# Altium PCB MiniSub_Power_Board.PcbDoc
Units mil, origin at the board's own origin, x right, y up, seen from the top; angles counter-clockwise.
Board outline 5010 x 2925 mil, 4 copper layers (Top Layer, Ground, Battery Voltage, Bottom Layer), stack 62.2 mil thick; 96 components, 76 nets, 384 pads, 84 vias.
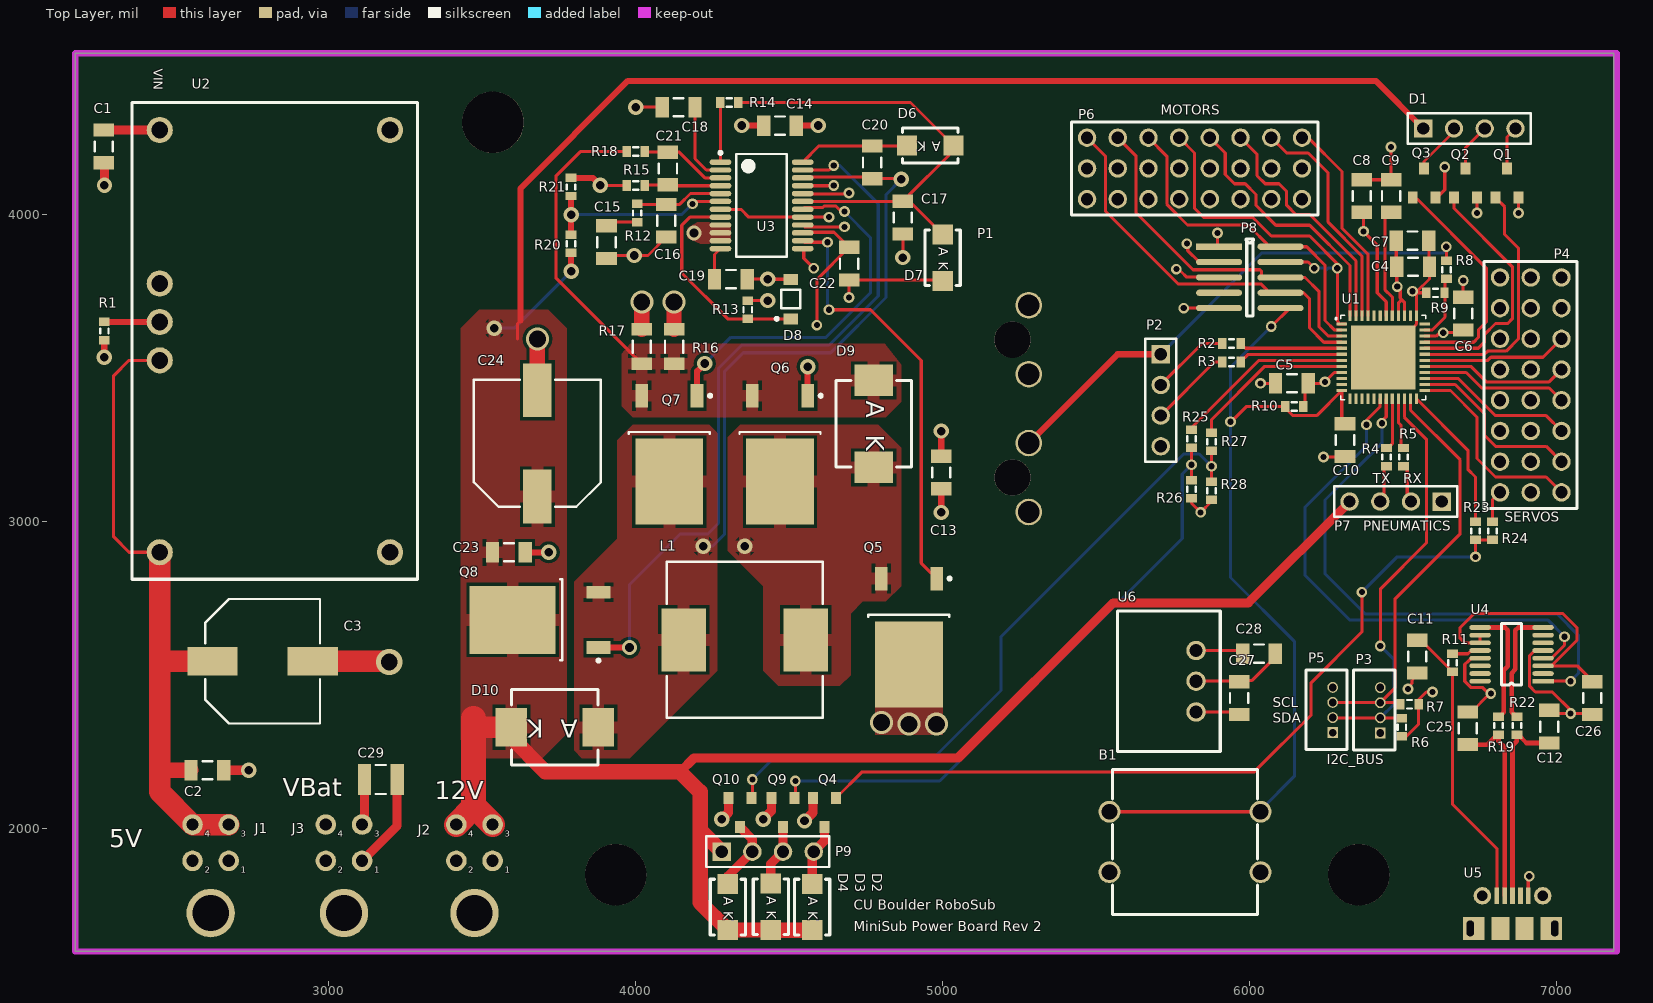
[diagram p0: Top Layer view]
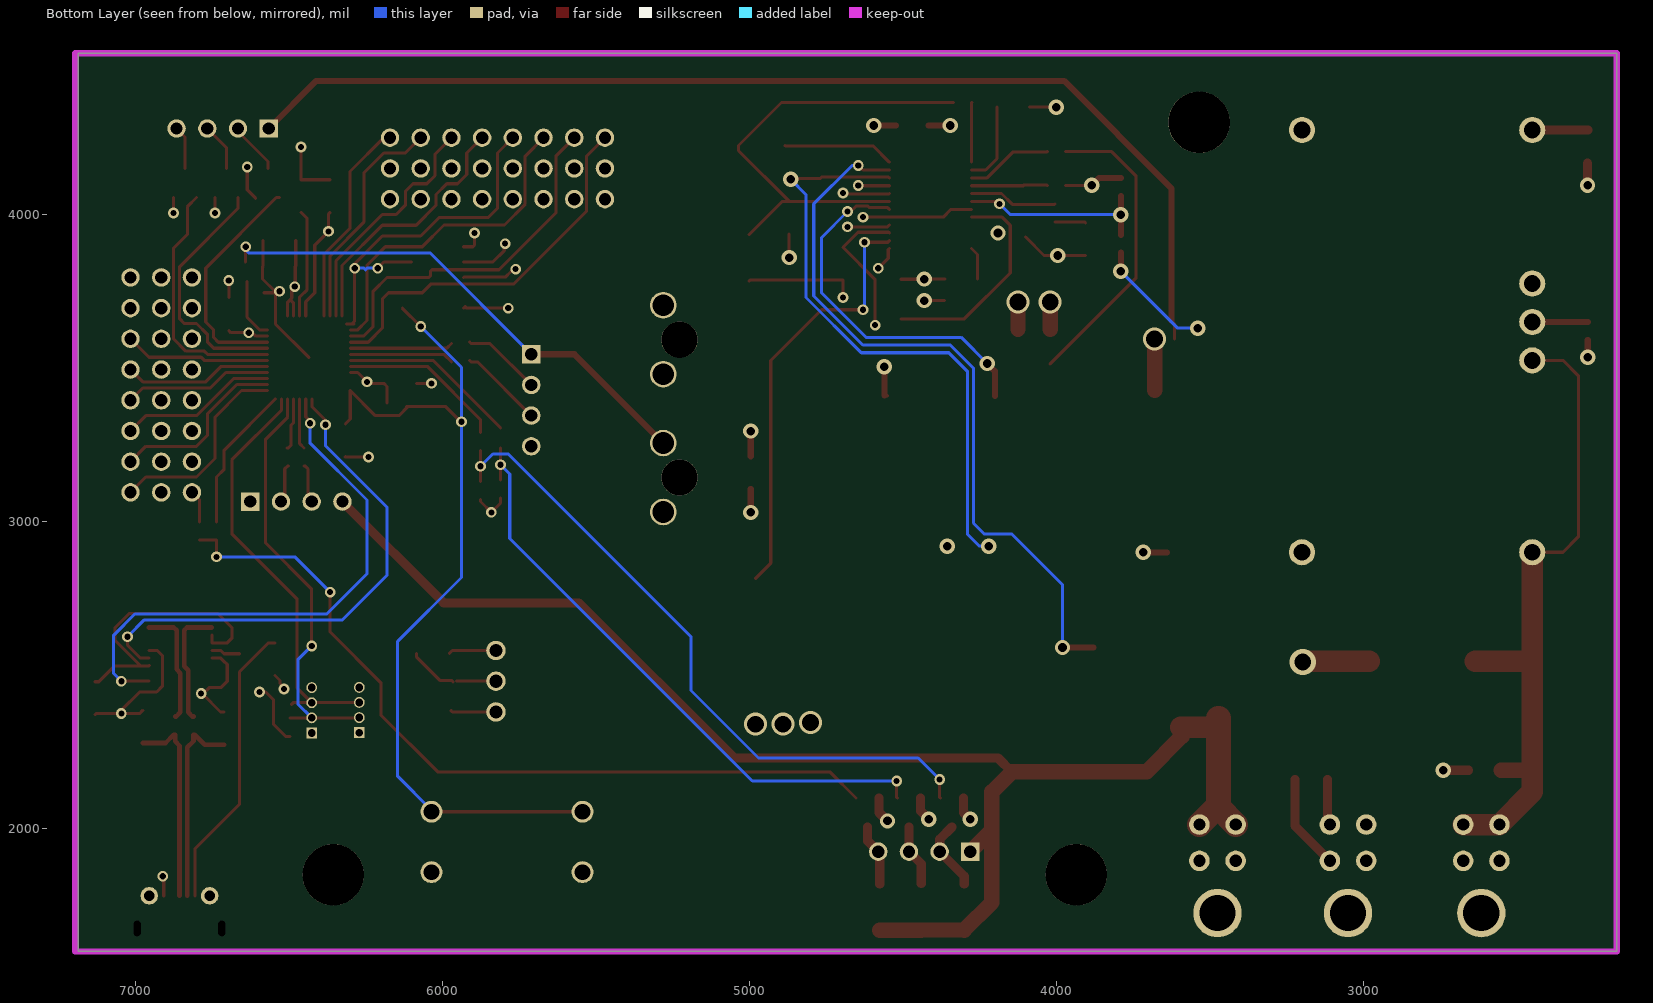
[diagram p1: Bottom Layer view, seen from below]
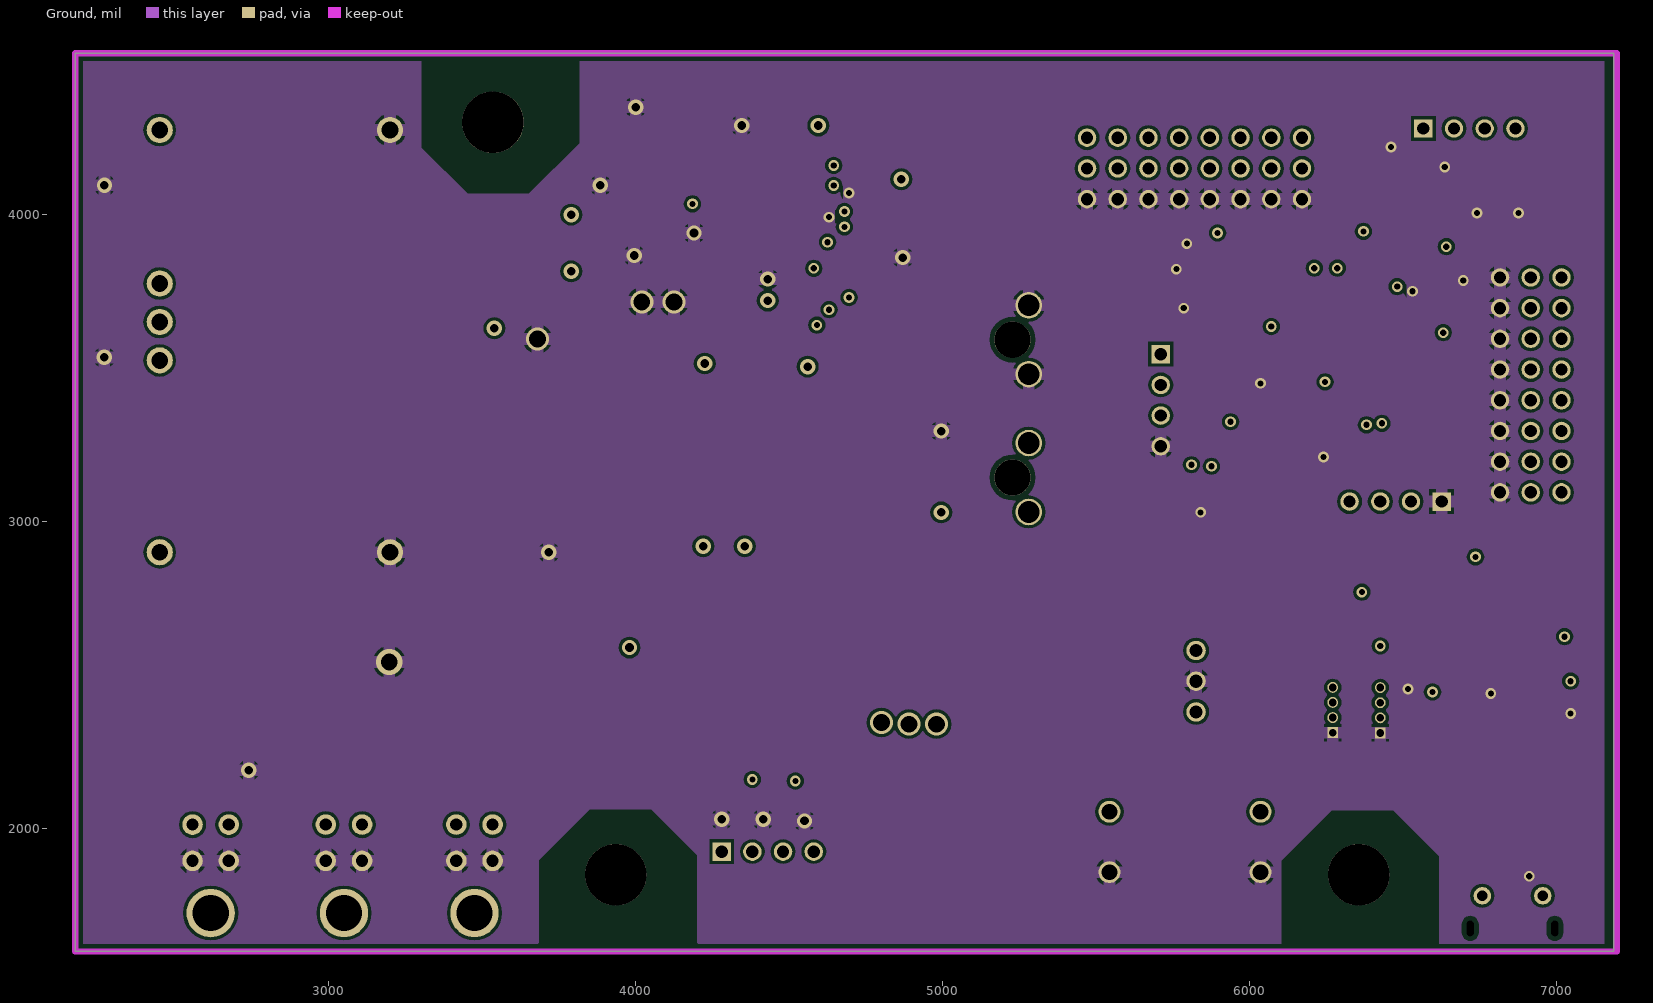
[diagram p2: Ground]
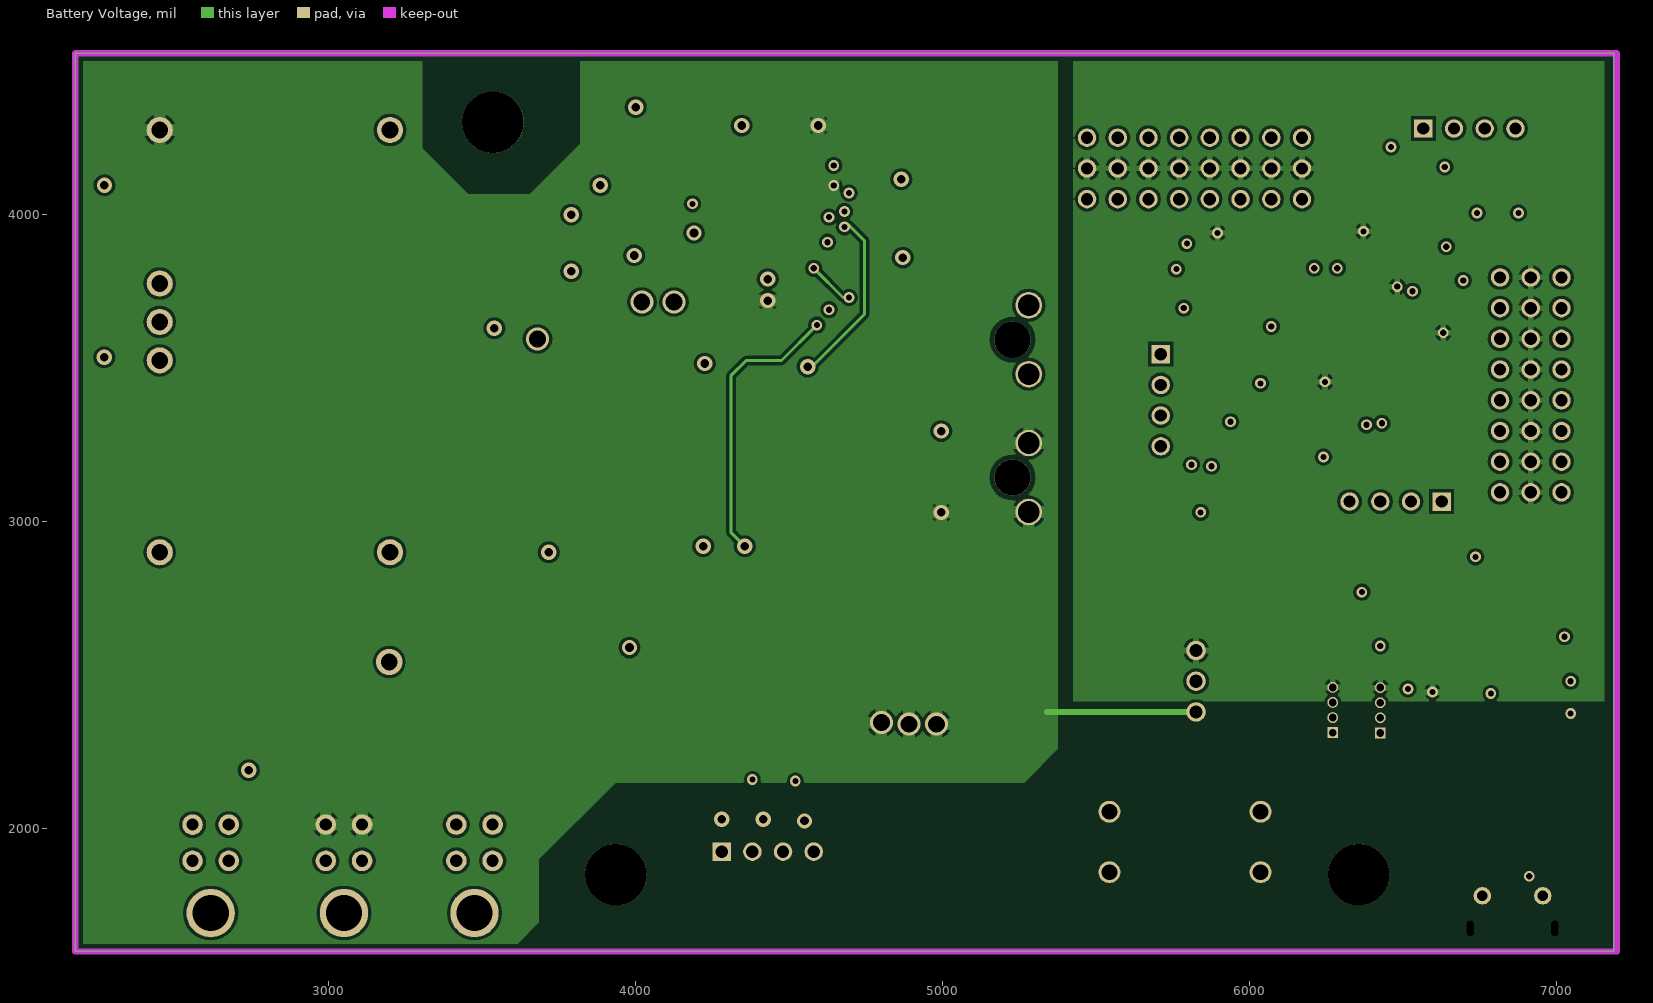
[diagram p3: Battery Voltage]

## Layer stack, top to bottom
Top Solder: solder mask 0.4, Solder Resist, Dk 3.5
Top Layer: signal copper 1.4
Dielectric 1: core 8, FR-4, Dk 4.6
Ground: signal copper 0.7
Dielectric 3: prepreg 42, FR-4, Dk 4.6
Battery Voltage: signal copper 0.7
Dielectric 2: core 8, FR-4, Dk 4.6
Bottom Layer: signal copper 1.4
Bottom Solder: solder mask 0.4, Solder Resist, Dk 3.5

## Board outline
2175,1600 2175,4525 7185,4525 7185,1600

## Design rules (kind name [scope] priority, off if disabled: settings)
BoardOutlineClearance [All] p1: gap=25 ignorepadtopadclearanceinfootprint=FALSE
Clearance Clearance_1 [IsNamedPolygon('TL_12V_GND')] p1: gap=10 ignorepadtopadclearanceinfootprint=FALSE except(3.5: Arc-Arc Arc-Track Arc-SMDPad Arc-Via Arc-Text Track-Track Track-SMDPad Track-Via Track-Text SMDPad-SMDPad SMDPad-Via SMDPad-Fill SMDPad-Poly SMDPad-Region SMDPad-Text Via-Via Via-Text Text-Text; 5: Arc-THPad Arc-Hole Track-THPad Track-Hole SMDPad-THPad SMDPad-Hole THPad-THPad THPad-Via THPad-Text THPad-Hole Via-Hole Text-Hole; 15: Fill-Hole Poly-Hole Region-Hole)
Clearance [All] p2: gap=10 ignorepadtopadclearanceinfootprint=FALSE except(3.5: Arc-Arc Arc-Track Arc-SMDPad Arc-Via Arc-Text Track-Track Track-SMDPad Track-Via Track-Text SMDPad-SMDPad SMDPad-Via SMDPad-Text Via-Via Via-Text Text-Text; 5: Arc-THPad Arc-Hole Track-THPad Track-Hole SMDPad-THPad SMDPad-Hole THPad-THPad THPad-Via THPad-Text THPad-Hole Via-Hole Text-Hole; 15: Fill-Hole Poly-Hole Region-Hole)
DiffPairsRouting [All] p1: maxlimit=10 minlimit=10 mostfreqgap=10 toplayer_minwidth=15 toplayer_maxwidth=15 toplayer_prefwidth=15 midlayer1_minwidth=15 midlayer1_maxwidth=15 midlayer1_prefwidth=15 midlayer2_minwidth=15 midlayer2_maxwidth=15 midlayer2_prefwidth=15 bottomlayer_minwidth=15 bottomlayer_maxwidth=15 bottomlayer_prefwidth=15 maxuncoupledlength=500
HoleSize [All] p1: absolutevalues=TRUE maxlimit=248.03 minlimit=7.87 maxpercent=80.000 minpercent=20.000
MinimumSolderMaskSliver [All] p1: minsoldermaskwidth=3.5
PolygonConnect PolygonConnect_3 [All vs IsNamedPolygon('TL_12V_VBat','TL_12V_GND')] p1: connectstyle=Direct reliefconductorwidth=40 reliefentries=4 polygonreliefangle="90 Angle" airgapwidth=10
PolygonConnect PolygonConnect_2 [All vs IsNamedPolygon('Top Layer-NetC23_2','Top Layer-NetC20_1','Top Layer-NetC22_1','Top Layer-NetD9_A','Ground','Battery Voltage-Vbat')] p2: connectstyle=Relief reliefconductorwidth=40 reliefentries=4 polygonreliefangle="90 Angle" airgapwidth=10
PolygonConnect PolygonConnect_1 [All vs IsNamedPolygon('Top Layer-NetC23_2') Or  IsNamedPolygon('Top Layer-NetC20_1') Or  IsNamedPolygon('Top Layer-NetC22_1') Or  IsNamedPolygon('Top Layer-NetD9_A') Or  IsNamedPolygon('Ground')] p3: thpad.connectstyle=Relief thpad.reliefconductorwidth=10 thpad.reliefentries=4 thpad.polygonreliefangle="90 Angle" thpad.airgapwidth=10 smdpad.connectstyle=Relief smdpad.reliefconductorwidth=10 smdpad.reliefentries=4 smdpad.polygonreliefangle="90 Angle" smdpad.airgapwidth=10 via.connectstyle=Relief via.reliefconductorwidth=40 via.reliefentries=4 via.polygonreliefangle="90 Angle" via.airgapwidth=10
PolygonConnect [All] p4: connectstyle=Relief reliefconductorwidth=20 reliefentries=4 polygonreliefangle="90 Angle" airgapwidth=10
RoutingVias [All] p1: holewidth=20 width=35 viastyle="Through Hole" minholewidth=7.87 minwidth=17.72 maxholewidth=60 maxwidth=100
SilkToSilkClearance [All] p1: silktosilkclearance=0
SilkToSolderMaskClearance [IsPad] p1: minsilkscreentomaskgap=3 clearancetoexposedcopper=TRUE
SolderMaskExpansion [All] p1: expansion=4 istentingtop=FALSE
Width [All] p1: maxlimit=100 minlimit=3.5 preferedwidth=10 minimp=50.000000 maximp=50.000000 favimp=50.000000
25 further rules are at their usual default settings.

## Classes and differential pairs
component class "Embedded Circuits": B1 C10 C11 C12 C25 C26 C27 C28 D1 D2 D3 D4 P8 P9 Q1 Q2 Q3 Q4 Q9 Q10 R10 R11 R19 R22 R23 R24 R25 R26 R27 R28 U4 U5 U6
component class Embedded_System_Top: P2 P3 P4 P5 P6 P7 R2 R3 R4 R5
component class Embedded_Chip: C4 C5 C6 C7 C8 C9 R6 R7 R8 R9 U1
component class MiniSub_Power_Board: C29 J1 J2 J3 P1
component class "5V Converter": C1 C2 C3 R1 U2
component class "12V Converter": C13 C14 C15 C16 C17 C18 C19 C20 C21 C22 C23 C24 D6 D7 D8 D9 D10 L1 Q5 Q6 Q7 Q8 R12 R13 R14 R15 R16 R17 R18 R20 R21 U3
differential pair USBD: +USBD_P -USBD_N
differential pair USBData: +USBData_P -USBData_N

## Components (designator, comment, footprint, x,y, rotation, side; value= is the part's Value field where it differs from the comment)
B1 "Push Button" "PUSH BUTTON" 5542.87,1858.15 r0 top
C1 "Cap Semi" C1206 2268.15,4221.85 r90 top value=3.3uF
C2 "Cap Semi" C1206 2605,2190 r180 top value=1uF
C3 "330uF" UUR1A331 2785,2545 r0 top
C4 "Cap Semi" C1206 6531.85,3830 r180 top value=10nF
C5 "Cap Semi" C1206 6136.85,3450 r0 top value=10nF
C6 "Cap Semi" C1206 6695,3676.85 r270 top value=100nF
C7 "Cap Semi" C1206 6530,3915 r180 top value=100nF
C8 "Cap Semi" C1206 6365,4060 r270 top value=10uF
C9 "Cap Semi" C1206 6460,4060 r90 top value=1uF
C10 "Cap Semi" C1206 6310,3265 r90 top value=1nF
C11 "Cap" C1206 6545,2560 r90 top value=10nF
C12 "Cap" C1206 6975,2331.85 r270 top value=47pF
C13 "Cap Semi" C1206 4995,3159.65 r270 top value=22u
C14 "Cap Semi" C1206 4470,4289.65 r0 top value=3.3u
C15 "Cap Semi" C1206 3905,3909.65 r90 top value=0.01u
C16 "Cap Semi" C1206 4100,3979.65 r90 top value=100p
C17 "Cap Semi" C1206 4870,3989.65 r90 top value=4.7u
C18 "Cap Semi" C1206 4140,4349.65 r0 top value=0.001u
C19 "Cap Semi" C1206 4310,3789.65 r180 top value=0.001u
C20 "Cap Semi" C1206 4770,4169.65 r90 top value=0.22u
C21 "Cap Semi" C1206 4105,4149.65 r90 top value=100p
C22 "Cap Semi" C1206 4695,3839.65 r270 top value=0.22u
C23 "Cap Semi" C1206 3586.85,2899.65 r180 top value=22u
C24 "390uF" PCVXXXXXMCLXGS 3680,3254.65 r90 top
C25 "Cap" C1206 6710,2326.85 r270 top value=47pF
C26 "Cap" C1206 7115,2425 r90 top value=100nF
C27 "Cap" C1206 5965,2425 r270 top value=10uF
C28 "Cap" C1206 6030,2570 r180 top value=10uF
C29 "HMK325C7475KN-TE" C1210 3170,2160 r0 top value=4.7uF
D1 "RGB LED Strip" "HEADER 1X4" 6565,4280 r0 top
D2 "1N58xx" 1N58XX 4575,1820 r270 top
D3 "1N58xx" 1N58XX 4440,1820.79 r270 top
D4 "1N58xx" 1N58XX 4300,1820 r270 top
D6 "1N5819HW" 1N58XX 5035,4224.65 r180 top
D7 "1N5819HW" 1N58XX 5000,3934.65 r270 top
D8 "MMSZ5230B" ONSC-SOD-123-2-425-04_V 4505,3724.65 r90 top
D9 "MBRS340" MBRS340 4775,3459.65 r270 top
D10 "MBRS340" MBRS340 3878.46,2329.65 r180 top
J1 "Molex 43045-0402" MOLEX43045-0402 2556.89,1895 r0 top
J2 "Molex 43045-0402" MOLEX43045-0402 3415.94,1895.08 r0 top
J3 "Molex 43045-0402" MOLEX43045-0402 2990.94,1895.08 r0 top
L1 "SRR1240-4R7M" SRR1240 4355,2614.65 r180 top
P1 "Molex2002411114" MOLEX2002411114 5280,3367.8 r270 top
P2 "Header 4" "HEADER 1X4" 5710,3545 r270 top
P3 "Depth Sensor Header" DF13-4P-1.25DSA 6425,2311.57 r90 top
P4 "Header 8X3" "HEADER 8X3" 7015,3795 r180 top
P5 "Header 4" DF13-4P-1.25DSA 6270,2312.36 r90 top
P6 "Header 8X3" "HEADER 8X3" 5470,4250 r270 top
P7 "Header 4" "HEADER 1X4" 6625,3065 r180 top
P8 "FTSH-105-01-L-DV-K-TR" FTSH-105-01-L-DV-K-TR 5900,3895 r0 top
P9 "Header 4" "Header 1x4" 4280,1925 r0 top
Q1 "DMN1019USN" SOT-23 6800,4055 r0 top
Q2 "DMN1019USN" SOT-23 6665,4055 r0 top
Q3 "DMN1019USN" SOT-23 6530.2,4055 r0 top
Q4 "DMN1019USN" SOT-23 4652.4,2099.49 r180 top
Q5 "BUK6212" NXP-SOT428_M 4890,2625.2 r270 top
Q6 "BUK6212" NXP-SOT428_M 4470.16,3220.67 r270 top
Q7 "BUK6212" NXP-SOT428_M 4109.84,3220.67 r270 top
Q8 "BUK6212" NXP-SOT428_M 3690,2679.65 r180 top
Q9 "DMN1019USN" SOT-23 4517.4,2099.49 r180 top
Q10 "DMN1019USN" SOT-23 4377.4,2099.49 r180 top
R1 "Res3" J1-0603 2269.53,3620.47 r90 top value=21K
R2 "Res3" J1-0603 5940.47,3580 r0 top value=20
R3 "Res3" J1-0603 5940.47,3520 r0 top value=20
R4 "Res3" J1-0603 6445,3210 r270 top value=20
R5 "Res3" J1-0603 6501.06,3210 r270 top value=20
R6 "Res3" J1-0603 6495,2330 r90 top value=4.7K
R7 "Res3" J1-0603 6520,2405 r180 top value=4.7K
R8 "Res3" J1-0603 6640,3820 r90 top value=10K
R9 "Res3" J1-0603 6604.53,3745 r0 top value=2K
R10 "Res3" J1-0603 6145,3375 r0 top value=47k
R11 "Res3" J1-0603 6660,2540 r90 top value=0
R12 "Res3" J1-0603 4005,4004.65 r90 top value=100k
R13 "Res3" J1-0603 4365,3689.65 r90 top value=51k
R14 "Res3" J1-0603 4305,4364.65 r180 top value=100k
R15 "Res3" J1-0603 4000,4094.65 r180 top value=100
R16 "Res3" R1206 4125,3569.65 r270 top value=0.018
R17 "Res3" R1206 4020,3569.65 r270 top value=0.018
R18 "Res3" J1-0603 4000,4204.65 r180 top value=100
R19 "Res3" J1-0603 6810,2335.47 r270 top value=27
R20 "Res3" J1-0603 3790,3904.65 r270 top value=113k
R21 "Res3" J1-0603 3790,4089.65 r270 top value=8.06k
R22 "Res3" J1-0603 6870,2335.47 r90 top value=27
R23 "Res3" J1-0603 6735,2969.53 r270 top value=1k
R24 "Res3" J1-0603 6790,2969.53 r270 top value=10k
R25 "Res3" J1-0603 5810,3269.53 r270 top value=1k
R26 "Res3" J1-0603 5810,3105.47 r90 top value=10k
R27 "Res3" J1-0603 5875,3260 r270 top value=1k
R28 "Res3" J1-0603 5875,3100.47 r90 top value=10k
U1 "EFM32PG12B500F1024IM48-C" QFN50P700X700X90-49N 6434.53,3534.76 r0 top
U2 "PTN78020WAH" PTN78020WAH 3200,4275 r270 top
U3 "LTC3780EG#PBF" LT-G-24_L 4410,4029.65 r0 top
U4 "FT230x" FT230X 6955,2480 r180 top
U5 "Micro USB" "MICRO USB" 6729.65,1675 r0 top
U6 "R-78E3.3-1.0" R-78EXX-1.0 5825,2380 r90 top

## Footprints (in the part's own frame and the unit in brackets; to place one, negate y for a bottom-side part, rotate by r counter-clockwise, add the part's x,y. Pads: shape width x height; smd on the part's side, far side on the other; paste and mask are expansions set on the pad)
1N58XX [mm] "1A Schottky Barrier Rectifier Diode"
  rect 1.655x1.67 smd: A(0,0) K(3.83,0)
  silkscreen extent -0.39,-1.45 4.22,1.45, body extent -0.4,-2 4.2,1.45, height 2.4
C1206 [mm] "Chip Capacitor, Body 3.2x1.6mm, IPC High Density"
  rect 1.1x1.7 smd: 1(-1.35,0) 2(1.35,0)
  silkscreen extent -0.4,-0.75 0.4,0.75, body extent -1.7,-0.9 1.7,0.9, height 1.3
C1210 [mm] "Chip Capacitor, Body 3.2x2.5mm, IPC High Density"
  rect 1.1x2.6 smd: 1(-1.35,0) 2(1.35,0)
  silkscreen extent -0.4,-1.2 0.4,1.2, body extent -1.7,-1.35 1.7,1.35, height 1.3
DF13-4P-1.25DSA [mm] "Depth Sensor Header footprint"
  rect 0.9x0.9 hole 0.65: 1(0,0)
  round 0.9 hole 0.65: 2(1.25,0) 3(2.5,0) 4(3.75,0)
  silkscreen extent -1.4,-1.2 5.2,2.2, body extent -1.43,-1.2 5.23,2.2, height 4.27
FT230X [mil] "USB to BASIC UART IC"
  rect 70x15 smd: 1(0,0)
  oval 70x15 smd: 2(0,-25) 3(0,-50) 4(0,-75) 5(0,-100) 6(0,-125) 7(0,-150) 8(0,-175) 9(205,-175) 10(205,-150) 11(205,-125) 12(205,-100) 13(205,-75) 14(205,-50) 15(205,-25) 16(205,0)
  silkscreen extent 70,-188 135,13, body extent 7,-205 200,31, height 54
FTSH-105-01-L-DV-K-TR [mil] "CONN HEADER 10POS DUAL .05\" SMD"
  rect 150x20 smd: 1(0,0)
  oval 150x20 smd: 2(200,0) 3(0,-50) 4(200,-50) 5(0,-100) 6(200,-100) 7(0,-150) 8(200,-150) 9(0,-200) 10(200,-200)
  silkscreen extent 88,-225 112,25, body extent -13,-224 217,26, height 241
"HEADER 1X4" [mil]
  rect 60x60 hole 40: 1(0,0)
  round 60 hole 40: 2(100,0) 3(200,0) 4(300,0)
  silkscreen extent -50,-50 350,50, body extent -50,-50 350,50, height 338
"Header 1x4" [mil]
  rect 60x60 hole 40: 1(0,0)
  round 60 hole 40: 2(100,0) 3(200,0) 4(300,0)
  silkscreen extent -50,-50 350,50, body extent -50,-50 350,50, height 338
"HEADER 8X3" [mil] "Connector Header Through Hole 24 position 0.1\""
  round 60 hole 40: 1(0,700) 2(100,700) 3(200,700) 4(0,600) 5(100,600) 6(200,600) 7(0,500) 8(100,500) 9(200,500) 10(0,400) 11(100,400) 12(200,400) 13(0,300) 14(100,300) 15(200,300) 16(0,200) 17(100,200) 18(200,200) 19(0,100) 20(100,100) 21(200,100) 22(0,0) 23(100,0) 24(200,0)
  silkscreen extent -51,-51 252,752, body extent -50,-50 250,750, height 330
J1-0603 [mm] "Chip Resistor, Body 1.6x0.8mm, IPC High Density"
  rect 0.7x0.9 smd: 1(-0.75,0) 2(0.75,0)
  silkscreen extent -0.2,-0.35 0.2,0.35, body extent -0.85,-0.48 0.85,0.48, height 0.9
LT-G-24_L [mm] "SOP, 24-Leads, Body 8.5x5.6mm, Pitch 0.65mm, IPC High Density"
  oval 1.8x0.45 smd mask+0.055: 1(-3.4,3.575) 2(-3.4,2.925) 3(-3.4,2.275) 4(-3.4,1.625) 5(-3.4,0.975) 6(-3.4,0.325) 7(-3.4,-0.325) 8(-3.4,-0.975) 9(-3.4,-1.625) 10(-3.4,-2.275) 11(-3.4,-2.925) 12(-3.4,-3.575) 13(3.4,-3.575) 14(3.4,-2.925) 15(3.4,-2.275) 16(3.4,-1.625) 17(3.4,-0.975) 18(3.4,-0.325) 19(3.4,0.325) 20(3.4,0.975) 21(3.4,1.625) 22(3.4,2.275) 23(3.4,2.925) 24(3.4,3.575)
  silkscreen extent -3.52,-4.25 2.1,4.47, body extent -2.8,-4.25 2.8,4.25, height 2
MBRS340 [mm] "Schottky Rectifier"
  rect 2.6x3.2 smd: A(0,0) K(7.2,0)
  silkscreen extent 0.02,-3.13 7.17,3.13, body extent -0.47,-3.55 7.68,3.6, height 2.65
"MICRO USB" [mm] "USB - micro B USB 2.0 Receptacle Connector 5 Position Surface Mount, Right Angle"
  round 0 hole 0.6 slot 1.3 at 90 deg unplated: 0(-0.3,0) 0(6.7,0)
  rect 1.8x1.9 smd: 0(0,0) 0(6.4,0)
  round 1.45 hole 0.85: 0(0.7,2.7) 0(5.7,2.7)
  rect 1.5x1.9 smd: 0(2.2,0) 0(4.2,0)
  rect 0.4x1.35 smd: 1(1.9,2.7) 2(2.55,2.7) 3(3.2,2.7) 4(3.85,2.7) 5(4.5,2.7)
  body extent -0.92,-2.6 7.28,2.8, height 2.73
MOLEX43045-0402 [mm] "43045-0402"
  round 1.7 hole 1.02: 1(3,0) 2(0,0) 3(3,3) 4(0,3)
  round 4 hole 3 unplated: ""(1.5,-4.32)
  body extent -3.57,-8.95 6.58,3.29, height 8.83
MOLEX2002411114 [mm]
  round 2.2 hole 1.8: 1(-8.55,0) 2(-2.85,0) 3(2.85,0) 4(8.55,0)
  round 3 hole 3 unplated: ""(-5.7,-1.34) ""(5.7,-1.34)
  body extent -11.72,-3.39 11.73,7.21, height 17.5
NXP-SOT428_M [mm] "DPAK, 3-Leads, Body 6.75x6.22mm, Pitch 2.29mm, IPC Low Density"
  rect 7.1x5.6 smd: D(2.3,0)
  rect 1.95x1.05 smd: G(-4.8,2.29) S(-4.8,-2.29)
  silkscreen extent -4.92,-3.35 -1.65,3.49, body extent -1.8,-3.37 4.42,3.37, height 2.38
ONSC-SOD-123-2-425-04_V [mm] "SOD, 2-Leads, Body 2.69x1.6mm"
  rect 0.91x1.22 smd: 1(-1.635,0) 2(1.635,0)
  silkscreen extent -1.76,-0.8 0.78,1.28, body extent -1.35,-0.8 1.35,0.8, height 1.35
PCVXXXXXMCLXGS [mm] "Aluminum Electrolytic Capacitor, Body 10.30x10.30x12.70mm, IPC Low Density"
  rect 4.45x2.35 smd: 1(-4.4,0) 2(4.4,0)
  silkscreen extent -5.25,-5.25 5.25,5.25, body extent -5.25,-5.25 5.25,5.25, height 12.7
PTN78020WAH [mil] "https://www.digikey.com/product-detail/en/texas-instruments/PTN78020WAH/296-20515-ND/717485"
  round 85 hole 55: 1(0,0) 2(0,-750) 3(500,-750) 4(625,-750) 5(750,-750) 6(1375,-750) 7(1375,0)
  Top Layer region: -35,-715
  Top Layer region: -35,35
  silkscreen extent -90,-840 1463,90, body extent -63,-832 1432,78, height 354
"PUSH BUTTON" [mm] "Tactile Switch SPST-NO Top Actuated Through Hole"
  round 1.808 hole 1.3: 1(12.5,0) 2(0,0) 3(12.5,5) 4(0,5)
  silkscreen extent 0.25,-3.5 12.25,8.5, body extent -0.77,-3.5 13.32,8.5, height 7.6
QFN50P700X700X90-49N [mm]
  rect 5.3x5.3 smd: 0(0,0)
  rect 0.86x0.26 smd: 1(-3.435,2.75) 2(-3.435,2.25) 3(-3.435,1.75) 4(-3.435,1.25) 5(-3.435,0.75) 6(-3.435,0.25) 7(-3.435,-0.25) 8(-3.435,-0.75) 9(-3.435,-1.25) 10(-3.435,-1.75) 11(-3.435,-2.25) 12(-3.435,-2.75) 25(3.435,-2.75) 26(3.435,-2.25) 27(3.435,-1.75) 28(3.435,-1.25) 29(3.435,-0.75) 30(3.435,-0.25) 31(3.435,0.25) 32(3.435,0.75) 33(3.435,1.25) 34(3.435,1.75) 35(3.435,2.25) 36(3.435,2.75)
  rect 0.26x0.86 smd: 13(-2.75,-3.435) 14(-2.25,-3.435) 15(-1.75,-3.435) 16(-1.25,-3.435) 17(-0.75,-3.435) 18(-0.25,-3.435) 19(0.25,-3.435) 20(0.75,-3.435) 21(1.25,-3.435) 22(1.75,-3.435) 23(2.25,-3.435) 24(2.75,-3.435) 37(2.75,3.435) 38(2.25,3.435) 39(1.75,3.435) 40(1.25,3.435) 41(0.75,3.435) 42(0.25,3.435) 43(-0.25,3.435) 44(-0.75,3.435) 45(-1.25,3.435) 46(-1.75,3.435) 47(-2.25,3.435) 48(-2.75,3.435)
  silkscreen extent -4,-3.5 3.5,3.5, body extent -3.5,-3.5 3.5,3.5, height 4.26
R1206 [mm] "Chip Resistor, 2-Leads, Body 3.10x1.60mm, IPC Medium Density"
  rect 1.05x1.7 smd: 1(-1.425,0) 2(1.425,0)
  silkscreen extent -0.5,-0.75 0.5,0.75, body extent -1.6,-0.85 1.6,0.85, height 0.65
R-78EXX-1.0 [mm] "1A DC/DC Voltage Converter"
  round 1.608 hole 1.1: 1(0,0) 2(2.54,0) 3(5.08,0)
  silkscreen extent -3.26,-2 8.34,6.5, body extent -3.3,-1.92 8.3,6.58, height 10.45
SOT-23 [mm]
  rect 0.8x1 smd: D(0.95,2.4) G(0,0) S(1.9,0)
  body extent -0.58,0.5 2.47,1.9, height 1.15
SRR1240 [mm] "Molded Inductor, 2-Leads, Body 12.50x12.50mm, IPC Medium Density"
  rect 3.7x5.2 smd: 1(-5.05,0) 2(5.05,0)
  silkscreen extent -6.45,-6.45 6.45,6.45, body extent -6.4,-6.4 6.4,6.4, height 4.5
UUR1A331 [mm] "Aluminum Electrolytic Capacitor, Body 9.50x10.30x10.30mm, IPC Low Density"
  rect 4.15x2.35 smd: 1(-4.15,0) 2(4.15,0)
  silkscreen extent -4.75,-5.15 4.75,5.15, body extent -4.75,-5.15 4.75,5.15, height 10.3

## Part data
B1: "Tactile Switch SPST-NO Top Actuated Through Hole", Digikey Link=https://www.digikey.com/product-detail/en/te-connectivity-alcoswitch-switches/FSM101/450-1157-ND/701084, Drawing=https://www.te.com/commerce/DocumentDelivery/DDEController?Action=srchrtrv&DocNm=1571140&DocType=Customer+Drawing&DocLang=English
C1 C2 C4 C5 C6 C7 C8 C9 C13 C14 C15 C16 C17 C18 C19 C20 C21 C22 C23: "Capacitor (Semiconductor SIM Model)", LatestRevisionDate=29-May-2009, LatestRevisionNote="IPC-7351 Footprint Added.", PackageDescription="Chip Capacitor", PackageReference=C1206, Published=8-Jun-2000, Publisher="Altium Limited"
C3 C24: library part PCV1E391MCL2GS, "CAP ALUM POLY 390UF 20% 25V SMD", Datasheet=http://nichicon-us.com/english/products/pdfs/e-pcv.pdf, Digikey=https://www.digikey.com/product-detail/en/nichicon/PCV1E391MCL2GS/493-4544-1-ND/2786841
C10: "Capacitor (Semiconductor SIM Model)", Supplier Part Number 1=490-4761-1-ND, LatestRevisionDate=29-May-2009, LatestRevisionNote="IPC-7351 Footprint Added.", PackageDescription="Chip Capacitor", PackageReference=C1206, Published=8-Jun-2000, Publisher="Altium Limited", Supplier 1=Digi-Key
C11: "Capacitor", Supplier Part Number 1=1276-1921-1-ND, LatestRevisionDate=17-Jul-2002, LatestRevisionNote="Re-released for DXP Platform.", PackageDescription="Radial Cap, Thru-Hole; 2 Leads; 0.3 in Pin Spacing", PackageReference=RAD-0.3, Published=8-Jun-2000, Publisher="Altium Limited", Supplier 1=Digi-Key
C12 C25: "Capacitor", Supplier Part Number 1=490-16375-1-ND, LatestRevisionDate=17-Jul-2002, LatestRevisionNote="Re-released for DXP Platform.", PackageDescription="Radial Cap, Thru-Hole; 2 Leads; 0.3 in Pin Spacing", PackageReference=RAD-0.3, Published=8-Jun-2000, Publisher="Altium Limited", Supplier 1=Digi-Key
C26: "Capacitor", Supplier Part Number 1=1276-1001-1-ND, LatestRevisionDate=17-Jul-2002, LatestRevisionNote="Re-released for DXP Platform.", PackageDescription="Radial Cap, Thru-Hole; 2 Leads; 0.3 in Pin Spacing", PackageReference=RAD-0.3, Published=8-Jun-2000, Publisher="Altium Limited", Supplier 1=Digi-Key
C27 C28: "Capacitor", Supplier Part Number 1=1276-2872-1-ND, LatestRevisionDate=17-Jul-2002, LatestRevisionNote="Re-released for DXP Platform.", PackageDescription="Radial Cap, Thru-Hole; 2 Leads; 0.3 in Pin Spacing", PackageReference=RAD-0.3, Published=8-Jun-2000, Publisher="Altium Limited", Supplier 1=Digi-Key
C29: library part "Cap Semi", "Capacitor (Semiconductor SIM Model)", ComponentLink1Description=Datasheet, ComponentLink1URL=https://www.yuden.co.jp/productdata/catalog/mlcc06_e.pdf, ComponentLink2Description=Digi-Key, ComponentLink2URL=https://www.digikey.com/product-detail/en/taiyo-yuden/HMK325C7475KN-TE/587-5038-1-ND/6563881, LatestRevisionDate=29-May-2009, LatestRevisionNote="IPC-7351 Footprint Added.", PackageDescription="Chip Capacitor", PackageReference=C1206, Published=8-Jun-2000, Publisher="Altium Limited"
D1: "LED RGB Strip - Bare Nonaddressable", Sparkfun Link=https://www.sparkfun.com/products/12021
D2 D3 D4: "1A Schottky Barrier Rectifier Diode", Datasheet=http://www.kesenes.com/pdf/1n5817-1n5819.pdf, Digikey=https://www.digikey.com/product-detail/en/comchip-technology/SS24-HF/641-SS24-HFCT-ND/10443817
D6 D7: library part 1N58xx, "1A Schottky Barrier Rectifier Diode", Datasheet=http://www.kesenes.com/pdf/1n5817-1n5819.pdf
D8: library part MMSZ5230BT1G, "Zener Voltage Regulator, 500 mW, 2-Pin SOD-123, Pb-Free, Tape and Reel", Manufacturer="On Semiconductor", Supplier Part Number 1=MMSZ5230BT1GOSTR-ND, ComponentLink1Description="Manufacturer URL", ComponentLink1URL=http://www.onsemi.com/, ComponentLink2Description=Datasheet, ComponentLink2URL=http://www.onsemi.com/pub_link/Collateral/MMSZ5221BT1-D.PDF, ComponentLink3Description="Package Specification", ComponentLink3URL=http://www.onsemi.com/pub_link/Collateral/425-04.PDF, DatasheetVersion="Rev. 12", Mounting Technology="Surface Mount", PackageDescription="2-Pin SOD, Body 1.6 x 2.69 mm", PackageReference=SOD-123-2-425-04, PackageVersion="Rev. G, 10/2009", Packing="Tape and Reel", PartNumber=MMSZ5230BT1G, P Max (W)=0.5, RoHS=Pb-Free, Supplier 1=Digi-Key, Supplier 2=Digi-Key, Supplier 3=Digi-Key, Supplier 4=Farnell, Supplier 5=Farnell, Supplier 6=Farnell, Supplier 7=Newark, Supplier 8=Newark, Supplier 9=Mouser, Supplier Part Number 2=MMSZ5230BT1GOSCT-ND, Supplier Part Number 3=MMSZ5230BT1GOSDKR-ND, Supplier Part Number 4=1431272, Supplier Part Number 5=1431272RL, Supplier Part Number 6=2370826, Supplier Part Number 7=83H7423, Supplier Part Number 8=67R1368, Supplier Part Number 9=863-MMSZ5230BT1G, VZ Typ (V)=4.7
D9 D10: "Schottky Rectifier", Datasheet=https://www.mouser.com/ds/2/308/MBRS340-1120985.pdf
J1 J2 J3: library part Molex43045-0402, "Micro-Fit 3.0 Right Angle Header, 3.00mm Pitch, Dual Row, 4 Circuits, with Snap-in Plastic Peg PCB Lock, Gold, Glow Wire Capable, Black", ComponentLink1Description="Molex Website", ComponentLink1URL=https://www.molex.com/molex/products/datasheet.jsp?part=active/0430450402_PCB_HEADERS.xml
L1: library part SRR1240, "FIXED IND 4.7UH 6A 18 MOHM SMD", Datasheet=https://www.bourns.com/docs/Product-Datasheets/SRR1240.pdf, Digikey=https://www.digikey.com/product-detail/en/bourns-inc/SRR1240-4R7M/SRR1240-4R7MCT-ND/2127398
P2 P5 P7 P9: "Header, 4-Pin", LatestRevisionDate=17-Jul-2002, LatestRevisionNote="Re-released for DXP Platform.", Publisher="Altium Limited"
P3: library part "Header 4", "Header, 4-Pin", LatestRevisionDate=17-Jul-2002, LatestRevisionNote="Re-released for DXP Platform.", Publisher="Altium Limited"
P4 P6: library part "Header 8X3 (2mm)", "Connector Header Through Hole 24 position 0.079\" (2.00mm)", Digikey=https://www.digikey.com/product-detail/en/samtec-inc/TMMH-108-01-T-T/SAM12190-ND/6692344, Drawing=http://suddendocs.samtec.com/prints/tmmh-1xx-xx-xx-x-xxx-mkt.pdf
P8: library part "JTAG Header", "CONN HEADER 10POS DUAL .05\" SMD", Datasheet=http://suddendocs.samtec.com/catalog_english/ftsh_smt.pdf, Digikey Link=https://www.digikey.com/product-detail/en/samtec-inc/FTSH-105-01-L-DV-K-TR/SAM13165CT-ND/8827920, Drawings=http://suddendocs.samtec.com/prints/ftsh-1xx-xx-xxx-dv-xxx-xxx-mkt.pdf
Q1 Q2 Q3 Q4 Q9 Q10: "12V N-Channel Enhancement Mode MOSFET", Datasheet=https://www.diodes.com/assets/Datasheets/DMN1019USN.pdf, Digikey=https://www.digikey.com/product-detail/en/diodes-incorporated/DMN1019USN-13/DMN1019USN-13DICT-ND/4898885
Q5 Q6 Q7 Q8: "N-Channel TrenchMOS Intermediate Level FET, 40 V, 50 A, 3-Pin SOT428, Tape and Reel", Manufacturer="NXP Semiconductors", PartNumber=BUK6212-40C,118, Supplier Part Number 1=568-6983-2-ND, Automotive Qualified=Y, Channel Type=N, Code_JEDEC=TO-252, Code_JEITA=SC-63, ComponentLink1Description="Manufacturer URL", ComponentLink1URL=http://www.nxp.com/, ComponentLink2Description=Datasheet, ComponentLink2URL=http://www.nxp.com/documents/data_sheet/BUK6212-40C.pdf, ComponentLink3Description="Package Specification", ComponentLink3URL=http://www.nxp.com/documents/outline_drawing/sot428_po.pdf, DatasheetVersion="Rev. 2", ID [max] (A)=50, IDM [max] (A)=233, Mounting Technology="Surface Mount", PackageDescription="3-Pin Plastic Single-ended Surface Mounted Package, Body 6.1 x 6.6 mm, Pitch 2.285 mm", PackageReference=SOT428, PackageVersion="14-06-10, 06/2014", Packing="Tape & Reel", Qr [typ] (nC)=38, Supplier 1=Digi-Key, Supplier 2=Digi-Key, Supplier 3=Digi-Key, Supplier 4=Mouser, Supplier Part Number 2=568-6983-1-ND, Supplier Part Number 3=568-6983-6-ND, Supplier Part Number 4=771-BUK621240C118, VDS [max] (V)=40, VGSth [typ] (V)=2.3
R1 R2 R3 R4 R5 R6 R7 R8 R9 R10 R11 R12 R13 R14 R15 R16 R17 R18 R19 R20 R21 R22 R23 R24 R25 R26 R27 R28: "Resistor", LatestRevisionDate=29-May-2009, LatestRevisionNote="IPC-7351 Footprint Added.", PackageDescription="Chip Resistor", PackageReference=J1-0603, Published=8-Jun-2000, Publisher="Altium Limited"
U1: "ARM® Cortex®-M4 Pearl Gecko Microcontroller IC 32-Bit 40MHz 1MB (1M x 8) FLASH 48-QFN (7x7)", Package="QFN-48 Silicon Labs", Availability=Unavailable, ComponentLink1Description=Digi-Key, ComponentLink1URL=https://www.digikey.com/product-detail/en/silicon-labs/EFM32PG12B500F1024IM48-C/336-5333-ND/8161157, MF="Silicon Labs", MP=EFM32PG12B500F1024GM48-B, Price=None, SnapEDA_Link=https://www.snapeda.com/parts/EFM32PG12B500F1024GM48-B/Silicon%20Labs/view-part/?ref=snap
U2: "6A DC DC Converter"
U3: "Buck-boost Controller, Constant Frequency, Current Mode Control with Power Good Output, 24-pin SOP (G-24), -40 to 85 degC, Pb-Free", Frequency Sync Range="200kHz - 400kHz", Manufacturer="Linear Technology", Supplier Part Number 1=LTC3780EG#PBF-ND, ComponentLink1Description="Manufacturer URL", ComponentLink1URL=http://www.linear.com/, ComponentLink2Description=Datasheet, ComponentLink2URL=http://cds.linear.com/docs/en/datasheet/3780ff.pdf, ComponentLink3Description="Package Specification", ComponentLink3URL=http://cds.linear.com/docs/en/packaging/SSOP_24_05-08-1640.pdf, DatasheetVersion="Rev. F", Mounting Technology="Surface Mount", Number of Outputs=1, PackageDescription="24-Pin Plastic SSOP, Body 8.2 x 5.3 mm, Pitch 0.65 mm", PackageReference=G-24, PackageVersion=Jun-10, PartNumber=LTC3780EG#PBF, RoHS=TRUE, Supplier 1=Digi-Key, Supplier 2=Farnell, Supplier 3=Newark, Supplier Part Number 2=1273545, Supplier Part Number 3=56M8395
U4: library part "FTDI FT230x", "USB to Basic UART IC", Datasheet=https://www.ftdichip.com/Support/Documents/DataSheets/ICs/DS_FT230X.pdf
U5: "USB - micro B USB 2.0 Receptacle Connector 5 Position Surface Mount, Right Angle", Datasheet=https://www.molex.com/pdm_docs/sd/1050170001_sd.pdf, Digikey=https://www.digikey.com/product-detail/en/molex-llc/1050170001/WM1399CT-ND/2350885
U6: library part R-78Exx-1.0, "1A DC/DC Voltage Converter", Datasheet=https://www.recom-power.com/pdf/Innoline/R-78Exx-0.5.pdf

## Free pads (board coordinates)
  round 200 hole 200 unplated: ""(3535,4300) ""(3935,1850) ""(6355,1850)

## Via types
v1: diameter 35, hole 20, Top Layer to Bottom Layer, 50 vias
v2: diameter 50, hole 28, Top Layer to Bottom Layer, 27 vias
v3: diameter 75, hole 55, Top Layer to Bottom Layer, 6 vias
v4: diameter 85, hole 55, Top Layer to Bottom Layer, 1 vias

## Nets (pads, with @x,y where several pads share a name; then routed paths per layer and width w, separated by ;. In a path a pad name is that pad's centre, name@x,y a point inside that pad or via, vN(x,y) a via of type N, cw(c..) or ccw(c..) an arc to the next point about the centre after c; other vN are vias at no path point)
3V3: C4.2 C5.2 C6.2 C7.2 C8.2 C28.2 P3.4 P4.2 P4.5 P4.8 P4.11 P4.14 P4.17 P4.20 P4.23 P5.4 P6.2 P6.5 P6.8 P6.11 P6.14 P6.17 P6.20 P6.23 P8.1 R6.1 R7.1 R10.2 U1.9 U1.34 U1.39 U1.40 U1.42 U6.3 | length 1487.4
  Top Layer w10: U6.3 5966.85,2580 C28.2 ; v1(5895,3940) 5895,3900 P8.1 P8.1@5930,3895 ; R10.2@6180,3385.47 6180,3440 C5.2 v1@6245,3450 ; v1(6245,3455) v1@6245,3450 ; v1@6250,3448.07 v1@6250,3450 ; U1.9 6275.55,3485.55 6250,3460 v1@6250,3450 ; C8.2 6370,4001.85 v1(6370,3945) 6415,3900 6415,3745 6444.37,3715.63 U1.42 ; C7.2 6476.85,3831.85 C4.2 6478.7,3771.3 v1@6485,3765 ; v1(6480,3765) v1@6485,3765 ; U1.40 6483.74,3711.24 6495,3722.5 ; R6.1 6510.47,2300.47 6549.53,2339.53 R7.1 6549.53,2419.53 6575,2445 v1(6595,2445) ; U1.39 6503.43,3714.07 6495,3722.5 ; U1.34 6606.9,3603.66 6618.24,3615 v1(6630,3615) 6688.15,3615 C6.2@6695,3621.85 ; v1@6245,3445.64 6249.36,3450 v1@6245,3450 ; v1@6245,3445.64 6244.36,3445 6245,3445 v1@6250,3450 ; v1@6245,3445.64 v1@6245,3450 ; v1@6485,3765 6490,3765 6490,3727.5 6495,3722.5
5V: C2.2 C3.1 J1.3 J1.4 U2.5 U2.6 | length 2208.8
  Top Layer w10: 2450,2175 2465,2190 ; U2.6 2350,2900 2300,2950 2300,3475 2350,3525 U2.5
  Top Layer w50: 2465,2190 C2.2
  Top Layer w70: U2.6 2450,2545 ; C3.1@2635,2545 C3.1 2450,2545 ; J1.3 J1.4 2450,2120 2450,2175 2450,2545
12V: C23.2 C24.1 D1.1 D2.K D3.K D4.K D10.K J2.3 J2.4 P7.4 P9.1 Q8.D R20.2 | length 8722.8
  Top Layer w10: 3615,3595 3615,3645 3625,3655 ; D4.K D4.K@4300.79,1670 ; D3.K D3.K@4440.79,1669.21
  Top Layer w20: 3625,3655 3625,4085 3975,4435 6410,4435 D1.1 ; v2(3790,3814.65) R20.2
  Top Layer w30: 4145,2185 4190,2230 5050,2230 5555,2735 5995,2735 P7.4
  Top Layer w40: D10.K@3590,2300.87 D10.K@3590,2310
  Top Layer w50: D10.K@3590,2300.87 3705.87,2185 4145,2185 4210,2120 4210,1995 ; P9.1 4210,1995 ; D4.K 4210,1759.21 4210,1995 ; D4.K@4300.79,1670 D3.K ; D3.K@4440.79,1669.21 D2.K
  Top Layer w70: 3471.85,2329.65 D10.K
  Top Layer w80: J2.4 3471.85,2069.09 3471.85,2075.39 ; 3471.85,2360 3471.85,2329.65 3471.85,2075.39 ; J2.3 3471.85,2075.39
  Bottom Layer w10: v2(3540,3629.65) 3605,3629.65 v2(3790,3814.65)
BG1-19V: Q7.G U3.18 | length 1198.5
  Top Layer w10: U3.18 4549.15,4022.15 4608.61,4022.15 4613.61,4027.15 4652.5,4027.15 4670,4009.65 v1(4680,4009.65)
  Top Layer w20: Q7.G 4200,3489.65 v2(4225,3514.65)
  Bottom Layer w10: v2(4225,3514.65) 4310,3599.65 4620,3599.65 4765,3744.65 4765,3924.65 v1(4680,4009.65)
BG2-19V: Q6.G U3.16 | length 817.8
  Top Layer w10: U3.16 4549.88,3959.65 v1(4680,3959.65) ; Q6.G@4550,3409.96 Q6.G@4550.31,3409.65
  Top Layer w20: Q6.G@4560,3409.96 v2(4560,3504.65)
  Battery Voltage w10: v2(4560,3504.65) 4575,3504.65 4745,3674.65 4745,3914.65 4693.98,3965.67 4687.95,3959.65 v1(4680,3959.65)
GND: B1.1 B1.2 C1.1 C2.1 C3.2 C4.1 C5.1 C6.1 C7.1 C8.1 C9.2 C10.1 C11.1 C12.1 C13.1 C14.1 C15.1 C16.1 C17.1 C18.1 C19.1 C23.1 C24.2 C25.1 C26.1 C27.1 C28.1 C29.2 D8.2 J1.1 J1.2 J2.1 J2.2 J3.1 J3.2 P1.1 P1.2 P2.4 P3.1 P4.3 P4.6 P4.9 P4.12 P4.15 P4.18 P4.21 P4.24 P5.1 P6.3 P6.6 P6.9 P6.12 P6.15 P6.18 P6.21 P6.24 P7.1 P8.3 P8.5 P8.9 Q1.S Q2.S Q3.S Q4.S Q9.S Q10.S R1.1 R9.1 R15.2 R16.1 R17.1 R21.1 R24.1 R26.1 R28.1 U1.0 U1.37 U2.1 U2.7 U3.7 U3.9 U3.10 U3.11 U3.17 U3.20 U4.5 U4.13 U5.5 U6.2 | length 5840.4
  Top Layer w10: v2@2255,3530 v2@2265,3520 ; C1.1 C1.1@2270,4166.85 ; v4@3195,2545 v4(3197.5,2542.5) ; v2(3885,4094.65) R15.2 ; C15.1@3905,3866.5 v2(3995,3866.5) 4040,3866.5 C16.1 ; v2(4000,4349.65) C18.1 ; U3.7 4342.8,4016.85 4368.39,3991.26 U3.17 U3.17 v1(4630,3991.34) ; C19.1 v2(4430,3789.65) 4430.63,3789.02 D8.2 ; U3.20 4544.74,4067.15 4692.5,4067.15 v1(4695,4069.65) ; v2(4870,3859.65) C17.1 ; v1(5760.82,3821.9) 5767.59,3821.9 5776.93,3812.56 5777.44,3812.56 5793.09,3796.91 5928.09,3796.91 P8.5@5930,3795 ; v1(5785,3695) P8.9 5920,3695 5925,3700 P8.9@5930,3695 ; v1(5795,3905) 5797.98,3902.02 5797.98,3882.02 5835,3845 P8.3@5930,3845 ; R26.1 5810,3060 v1(5840,3030) 5875,3065 R28.1 ; U6.2 C27.1@5953.99,2480 ; C27.1 5969.5,2482.65 6007.61,2482.65 6083.15,2558.19 C28.1 ; v1(6035,3450) C5.1 ; v1(6240,3210) 6316.85,3210 C10.1@6315,3211.85 ; C8.1 C9.2 v1(6460,4220) ; U1.0 6542.68,3642.91 6542.68,3669.88 U1.37 6542.91,3670.12 v1@6542.91,3747.91 ; v1(6515,2455) 6515,2460 6527.98,2472.98 6527.98,2482.05 6544.63,2498.7 C11.1@6545,2498.7 ; v1(6530,3750) 6535,3750 6540,3745 v1@6542.91,3747.91 ; R9.1@6580,3745 R9.1 6545.83,3745 v1@6542.91,3747.91 ; C7.1 6583.15,3831.85 C4.1 6585,3790 v1@6542.91,3747.91 ; Q3.S@6607.5,4052.5 6635,4080 v1(6635,4155) ; C6.1 v1(6695,3785) ; C25.1 6721.81,2380 v1@6781.81,2440 ; v1(6740,4005) Q2.S@6740,4055 ; U4.13 6721.15,2555 6708.22,2542.07 6707.07,2542.07 6700,2535 6700,2479.87 6720.79,2459.08 6759.16,2459.08 6778.24,2440 v1@6781.81,2440 ; v1(6785,2440) v1@6781.81,2440 ; R24.1 6790,3070 P4.3 ; Q1.S 6874.8,4005.2 v1(6875,4005) ; U5.5 6906.81,1841.81 v1(6910,1845) ; U4.5 6927.5,2580 6911.5,2564 6911.5,2463.5 6930,2445 6985,2445 7045,2385 v1(7045,2375) ; C12.1 6985,2375 v1(7045,2375) ; C26.1@7130,2371.85 7126.85,2375 v1(7045,2375)
  Top Layer w20: v2(2269.53,3534.53) R1.1 ; C23.1 v2(3716.85,2899.65) ; R21.1 3860.47,4119.17 v2(3885,4094.65) ; v2(4345,4289.65) C14.1 ; C13.1 v2(4995,3294.65)
  Top Layer w30: v2(2270,4095) C1.1@2270,4166.85 ; C2.1 v2(2740,2190) ; J3.1 3223.15,2009.17 C29.2 ; v2(4280,2030) 4302.6,2052.6 Q10.S ; v2(4415,2030) 4442.6,2057.6 Q9.S ; v2(4550,2025) 4577.6,2052.6 Q4.S
  Top Layer w50: C24.2 v3(3680,3594.65) ; R17.1 v3(4020,3714.65) ; R16.1 v3(4125,3714.65)
  Top Layer w70: C3.2@2981.46,2545 v4@3195,2545
  other v2: 4190,3939.65
NetC9_1: C9.1 U1.41 | length 355.1
  Top Layer w10: C9.1 6440,3986.85 6440,3755 6464.06,3730.94 U1.41
NetC11_2: C11.2 R11.1 U5.1 | length 943.9
  Top Layer w10: C11.2@6545,2605 6565.47,2605 R11.1 6660,2079.09 6805.39,1933.7 6805.39,1782.24 U5.1
NetC15_2: C15.2 R12.1 | length 101
  Top Layer w10: C15.2@3905,3972.8 3907.32,3975.12 R12.1
NetC16_2: C16.2 R12.2 U3.5 | length 286.3
  Top Layer w10: R12.2 4006.38,4032.8 C16.2 4143.15,4032.8 4178.39,4068.03 U3.5
NetC17_2: C17.2 D6.A D7.A R14.1 U3.19 | length 1510
  Top Layer w10: R14.1 4895,4364.65 D6.A 5035,4207.8 C17.2 ; U3.19 4544.15,4042.15 4869.35,4042.15 C17.2 ; D7.A 4891.85,4042.8 C17.2
NetC18_2: C18.2 U3.2 | length 266.2
  Top Layer w10: C18.2 4193.15,4181.81 4230.16,4144.8 U3.2
NetC19_2: C19.2 U3.12 | length 107.2
  Top Layer w10: C19.2 4256.85,3869.61 U3.12
NetC20_1: C20.1 D10.A L1.2 Q7.D Q8.S U3.22 | length 1972.2
  Top Layer w10: U3.22 4546.79,4122.15 4764.35,4122.15 C20.1 4863.15,4116.5 v2(4865,4114.65)
  Bottom Layer w10: v2(4220,2919.65) 4250,2919.65 4290,2959.65 4290,3489.65 4350,3549.65 4635,3549.65 4815,3729.65 4815,4064.65 v2(4865,4114.65)
NetC20_2: C20.2 D6.K U3.24 | length 362.8
  Top Layer w10: U3.24 4596.26,4222.8 C20.2 4882.36,4222.8 D6.K
NetC21_1: C21.1 R15.1 U3.4 | length 248.6
  Top Layer w10: R15.1 4031.38,4096.5 C21.1 4107.87,4093.62 U3.4
NetC21_2: C21.2 R18.1 U3.3 | length 282
  Top Layer w10: R18.1 4031.38,4202.8 C21.2 4141.85,4202.8 4225.43,4119.21 U3.3
NetC22_1: C22.1 D9.K L1.1 Q5.S Q6.D U3.15 | length 1391.1
  Top Layer w10: U3.15 4545.93,3942.15 4645.65,3942.15 C22.1 4590,3787.8 v1(4590,3639.65)
  Battery Voltage w10: v2(4355,2919.65) 4310,2964.65 4310,3474.65 4360,3524.65 4475,3524.65 v1(4590,3639.65)
NetC22_2: C22.2 D7.K U3.13 | length 596.5
  Top Layer w10: U3.13 4547.4,3885.35 4547.4,3857.24 v1(4580,3824.65) ; v1(4695,3729.65) C22.2 4997.36,3786.5 D7.K
  Battery Voltage w10: v1(4580,3824.65) 4675,3729.65 v1(4695,3729.65)
NetC26_2: C26.2 U4.3 U4.10 U4.11 | length 905.5
  Top Layer w10: U4.10 U4.11 6700,2605 6685,2620 6685,2655 6730,2700 7020,2700 7065,2655 7065,2612.5 U4.3@6982.5,2530 ; U4.3@6954.04,2530.96 U4.3 U4.3@6982.5,2530 ; C26.2@7130,2478.15 7118.19,2478.15 7066.34,2530 U4.3@6982.5,2530
NetD1_2: D1.2 Q3.D | length 170.9
  Top Layer w10: Q3.D 6567.6,4172.6 6665,4270 D1.2
NetD1_3: D1.3 Q2.D | length 156.4
  Top Layer w10: Q2.D 6702.4,4217.4 D1.3
NetD1_4: D1.4 Q1.D | length 155.5
  Top Layer w10: Q1.D 6837.4,4252.4 D1.4 D1.4@6865,4266.47
NetD8_1: D8.1 R13.1 U3.8 | length 709.2
  Top Layer w10: U3.8 4176.61,3991.26 4150,3964.65 4150,3809.65 4299.53,3660.12 R13.1 4365.16,3660.28 D8.1
NetD9_A: D9.A Q6.S Q7.S R16.2 R17.2 R18.2 | length 990.7
  Top Layer w10: R18.2 3820,4204.65 3740,4124.65 3740,3793.54 R17.2
NetP2_2: P2.2 R2.1 | length 258.9
  Top Layer w10: P2.2 5845,3580 5905.94,3580 R2.1@5910.94,3585
NetP2_3: P2.3 R3.1 | length 275.5
  Top Layer w10: P2.3 5885,3520 5905.94,3520 R3.1@5910.94,3525
NetP7_2: P7.2 R5.2 | length 128.1
  Top Layer w10: R5.2@6500,3180.47 R5.2 6503.94,3180.47 6512.72,3171.69 6512.72,3090.81 6525,3078.53 P7.2
NetP7_3: P7.3 R4.2 | length 128.1
  Top Layer w10: P7.3 6425,3078.53 6437.28,3090.81 6437.28,3171.69 6446.06,3180.47 R4.2@6450,3180.47
NetQ4_G: Q4.G R23.2 R24.2 | length 2655.6
  Top Layer w10: Q4.G 4737.91,2185 6015,2185 6200,2370 6200,2475 6365,2640 v1(6365,2770) ; v1(6735,2885) R23.2 R24.2
  Bottom Layer w10: v1(6365,2770) 6480,2885 v1(6735,2885)
NetQ9_G: Q9.G R25.2 R26.2 | length 2001.2
  Top Layer w10: Q9.G 4520,2102.09 v1(4520,2155) ; R26.2 v1(5810,3185) R25.2
  Bottom Layer w10: v1(4520,2155) 4990,2155 5780,2945 5780,3155 v1(5810,3185)
NetQ10_G: Q10.G R27.2 R28.2 | length 2215.2
  Top Layer w10: Q10.G 4380,2102.09 v1(4380,2160) ; R28.2 v1(5875,3180) R27.2
  Bottom Layer w10: v1(4380,2160) 4450,2230 4970,2230 5190,2450 5190,2625 5785,3220 5835,3220 v1(5875,3180)
NetR1_2: R1.2 U2.4 | length 180.5
  Top Layer w20: R1.2 U2.4
NetR8_1: R8.1 R9.2 U1.35 | length 199.2
  Top Layer w10: U1.35 6569.88,3623.46 6593.46,3623.46 6635.47,3665.47 R8.1@6635.47,3781.54
NetR11_2: R11.2 U4.12 | length 94.3
  Top Layer w10: R11.2 6710.67,2569.53 6721.15,2580 U4.12
NetR14_2: R14.2 U3.1 | length 194.5
  Top Layer w10: R14.2 4276.14,4363.98 U3.1
NetR20_1: R20.1 R21.2 U3.6 | length 629.8
  Top Layer w10: v1(4185,4034.65) 4192.8,4042.44 U3.6
  Top Layer w20: R20.1 v2(3790,3999.65) R21.2
  Bottom Layer w10: v2(3790,3999.65) 4150,3999.65 v1(4185,4034.65)
NetR23_1: R23.1 U1.24 | length 480.1
  Top Layer w10: U1.24 6710,3232.32 6710,3170 6735,3145 R23.1
NetR25_1: R25.1 U1.7 | length 580.4
  Top Layer w10: R25.1@5810,3305 6029.92,3524.92 U1.7
NetR27_1: R27.1 U1.8 | length 538.4
  Top Layer w10: R27.1 5875,3331.77 6048.47,3505.24 U1.8
NetU1_18: U1.18 U4.4 | length 1718.8
  Top Layer w10: v1(6380,3315) 6380,3330 6424.69,3374.69 U1.18 ; U4.4 6982.5,2555 7025,2597.5 v1(7025,2625)
  Bottom Layer w10: v1(6380,3315) 6380,3246.77 6180,3046.77 6180,2825 6325,2680 6970,2680 v1(7025,2625)
NetU1_19: U1.19 U4.1 | length 1823.4
  Top Layer w10: v1(6430,3320) 6430,3326.76 6444.37,3341.14 U1.19 ; U4.1 7033.24,2480 7043.24,2470 7045,2471.76 v1(7045,2480)
  Bottom Layer w10: v1(6430,3320) 6430,3255 6245,3070 6245,2830 6376,2699 7001,2699 7070,2630 7070,2505 v1(7045,2480)
"PA0 ARM PWM 0": P4.1 U1.25 | length 661.6
  Top Layer w10: U1.25 6653.5,3426.5 6740,3340 6740,3205 6800,3145 6965,3145 P4.1
"PA1 ARM PWM 1": P4.4 U1.26 | length 590.3
  Top Layer w10: U1.26 6668.82,3446.18 6765,3350 6765,3280 6800,3245 6965,3245 P4.4
"PA2 ARM PWM 2": P4.7 U1.27 | length 516
  Top Layer w10: U1.27 6679.13,3465.87 6800,3345 6965,3345 P4.7
"PA3 ARM PWM 3": P4.10 U1.28 | length 482.7
  Top Layer w10: U1.28 6704.45,3485.55 6755,3435 6975,3435 P4.10
"PA4 ARM PWM 4": P4.13 U1.29 | length 482.6
  Top Layer w10: U1.29 6719.76,3505.24 6770,3455 6975,3455 P4.13
"PA5 ARM PWM 5": P4.16 U1.30 | length 474.3
  Top Layer w10: U1.30 6774.92,3524.92 6785,3535 6955,3535 P4.16
"PB11 LED R": Q1.G U1.31 | length 817.2
  Top Layer w10: U1.31 6764.61,3544.61 6775,3555 6835,3555 6875,3595 6875,3890 6830,3935 6830,4025 Q1.G
"PB12 LED G": Q2.G U1.32 | length 813.2
  Top Layer w10: U1.32 6744.29,3564.29 6765,3585 6765,3610 6800,3645 6840,3645 6855,3660 6855,3830 6665,4020 Q2.G
"PB13 LED B": Q3.G U1.33 | length 752.3
  Top Layer w10: Q3.G 6540,4055 6770,3825 6770,3650 6745,3625 6745,3600 6728.98,3583.98 U1.33
"PC8 MOTOR PWM 1": P6.1 U1.45 | length 680.9
  Top Layer w10: P6.1 6190,4250 6300,4140 6300,3955 6385.31,3869.68 U1.45
"PC9 MOTOR PWM 2": P6.4 U1.46 | length 743.5
  Top Layer w10: P6.4 6120,4200 6190,4200 6255,4135 6255,3975 6365.63,3864.37 U1.46
"PC10 MOTOR PWM 3": P6.7 U1.47 | length 788.4
  Top Layer w10: P6.7 6023.5,4196.5 6023.5,4126.5 6050,4100 6095,4100 6120,4075 6120,4030 6150,4000 6195,4000 6345.94,3849.06 U1.47
"PC11 MOTOR PWM 4": P6.10 U1.48 | length 853.9
  Top Layer w10: P6.10 5920,4200 5920,4130 5950,4100 5985,4100 6020,4065 6020,4030 6085,3965 6195,3965 6326.26,3833.74 U1.48
"PD11 PNEU UART TX": R4.1 U1.20 | length 165.8
  Top Layer w10: R4.1@6450,3239.53 6464.06,3253.58 U1.20
"PD12 PNEU UART RX": R5.1 U1.21 | length 171.1
  Top Layer w10: U1.21 6483.74,3322.28 6492.28,3313.74 6492.28,3248.31 R5.1 R5.1@6505,3239.53
"PD13 I2C SDA": P3.2 P5.2 R6.2 U1.22 | length 1394.3
  Top Layer w10: P5.2 6271.57,2360 6424.21,2360 P3.2 6493.74,2360.79 R6.2 ; v1(6425,2595) 6425,2780 6575,2930 6575,3268.37 6503.43,3339.94 U1.22
  Bottom Layer w10: P3.2 6470,2405.79 6470,2550 v1(6425,2595)
"PD14 I2C SCL": P3.3 P5.3 R7.2 U1.23 | length 1387.1
  Top Layer w10: P5.3 6270.79,2410 P3.3 ; R7.2 6485.47,2410 P3.3 ; U1.23 6523.11,3362.6 6685,3200.71 6685,2960 6472.43,2747.43 6472.43,2457.43 P3.3
"PF0 MOTOR PWM 5/TCK": P6.13 P8.4 U1.1 | length 1223.8
  Top Layer w10: P6.13 5820,4200 5820,4020 5850,3990 6010,3990 6070,3930 6195,3930 6295,3830 6290,3825 v1(6285,3825) 6285,3653.03 U1.1@6295,3643.03 ; P8.4 6190,3845 v1(6210,3825) ; U1.1@6287.48,3643.03 U1.1@6295,3643.03 ; U1.1@6311.22,3643.15 6311.1,3643.03 U1.1 U1.1@6295,3643.03
  Bottom Layer w10: v1(6210,3825) 6244.88,3825 6249.88,3820 6254.88,3825 v1(6285,3825)
"PF1 MOTOR PWM 6/TMS": P6.16 P8.2 U1.2 | length 1086
  Top Layer w10: P6.16 5730,4190 5730,4033.43 5797.43,3966 5994,3966 6065,3895 P8.2 6185,3895 6245,3835 6245,3655 6276.65,3623.35 U1.2
"PF2 MOTOR PWM 7/TDO": P6.19 P8.6 U1.3 | length 1181.3
  Top Layer w10: P6.19 5630,4190 5630,4005 5815,3820 6032.93,3820 6038.79,3814.14 6038.79,3799.62 6043.41,3795 6180,3795 6225,3750 6225,3635 6256.34,3603.66 U1.3
"PF3 MOTOR PWM 8/TDI": P6.22 P8.8 U1.4 | length 1266.3
  Top Layer w10: P6.22 5530,4190 5530,4010 5766,3774 6036,3774 6065,3745 P8.8 6175,3745 6195,3725 6195,3630 6241.02,3583.98 U1.4
"PF4 HYDRO UART TX": R2.2 U1.5 | length 335.8
  Top Layer w10: R2.2 5985.71,3564.29 U1.5
"PF5 HYDRO UART RX": R3.2 U1.6 | length 339.5
  Top Layer w10: R3.2 5994.61,3544.61 U1.6
RST: B1.3 B1.4 C10.2 P8.10 R10.1 U1.12 | length 2889.6
  Top Layer w10: B1.4 B1.3 ; v1@5940,3325 5990,3375 R10.1@6110.47,3375 ; v1(6070,3635) P8.10@6130,3695 ; R10.1 R10.1@6110.47,3375 ; C10.2@6315,3318.15 6299.41,3333.74 6299.41,3426.38 U1.12 6217.8,3345 6140.47,3345 R10.1@6110.47,3375
  Bottom Layer w10: B1.3 6035,2060 6145,2170 6145,2610 5937.25,2817.75 v1(5937.25,3325) 5937.25,3502.25 v1(6070,3635)
"SOLEN6 DRAIN": D3.A P9.3 Q9.D | length 200.8
  Top Layer w30: D3.A 4440,1885 P9.3 Q9.D
"SOLEN7 DRAIN": D4.A P9.2 Q10.D | length 234.7
  Top Layer w30: D4.A 4300,1845 P9.2 4380,1965 Q10.D
"SOLEN15 DRAIN": D2.A P9.4 Q4.D | length 201.6
  Top Layer w10: P9.4@4575,1920 P9.4
  Top Layer w30: D2.A P9.4@4575,1920 ; P9.4 4615,1960 Q4.D
TG1-19V: Q8.G U3.23 | length 2405.3
  Top Layer w10: Q8.G Q8.G@3879.13,2589.65 ; U3.23 4630.16,4144.8 v1(4645,4159.65)
  Top Layer w20: Q8.G@3879.13,2589.65 v2(3980,2589.65)
  Bottom Layer w10: v2(3980,2589.65) 3980,2794.65 4145,2959.65 4235,2959.65 4270,2994.65 4270,3499.65 4345,3574.65 4630,3574.65 4790,3734.65 4790,4034.65 4665,4159.65 v1(4645,4159.65)
TG2-19V: Q5.G U3.14 | length 1404.8
  Top Layer w10: U3.14 4548.7,3909.65 v1(4625,3909.65) ; v1(4629.84,3689.8) 4764.84,3689.8 4930,3524.65 4930,2864.33 Q5.G
  Bottom Layer w10: v1(4625,3909.65) 4625,3694.65 v1(4629.84,3689.8)
USBD_N: R19.1 U4.9 | length 389.6
  Top Layer w15: U4.9 6831.21,2655 6840,2646.21 6840,2528.75 6827.5,2516.25 6827.5,2378.56 6813.94,2365 R19.1
USBD_P: R22.2 U4.8 | length 389.6
  Top Layer w15: R22.2 6866.06,2365 6852.5,2378.56 6852.5,2505.89 6865,2518.39 6865,2646.21 6873.79,2655 U4.8
USBData_N: C25.2 R19.2 U5.2 | length 646.3
  Top Layer w15: C25.2 6773.82,2273.7 6806.06,2305.94 R19.2 6810,2284.67 6830.04,2264.63 U5.2
USBData_P: C12.2 R22.1 U5.3 | length 646.9
  Top Layer w15: U5.3 6855.63,2270.3 6870,2284.67 R22.1 6873.94,2305.94 6901.18,2278.7 C12.2
Vbat: C1.2 C13.2 C14.2 C27.2 C29.1 J3.3 J3.4 P1.3 P1.4 P2.1 Q5.D R8.2 R13.2 U2.2 U3.21 U6.1 | length 2962.4
  Top Layer w10: J3.3 J3.3@3116.85,2020.98 ; R13.2 4365.47,3719.65 v2(4430,3719.65) ; U3.21 4643.98,4093.62 v1(4645,4094.65) ; U6.1 5966.85,2380 C27.2@5971.85,2385 ; R8.2@6640,3844.53 v1(6640,3895)
  Top Layer w20: C14.2 v2(4595,4289.65) ; v2(4995,3029.65) C13.2 ; P1.3 5569.41,3545 P2.1
  Top Layer w30: C1.2 U2.2 ; J3.3@3116.85,2020.98 C29.1
  Battery Voltage w20: 5340,2380 U6.1
  Bottom Layer w10: P2.1 6040,3875 6630,3875 v1@6647,3892
  other v3: 4890,2340 4980,2340 4800,2345
pads on no net: J1. J2. J3. P1. P4.19 P4.22 P8.7 U1.10 U1.11 U1.13 U1.14 U1.15 U1.16 U1.17 U1.36 U1.38 U1.43 U1.44 U2.3 U4.2 U4.6 U4.7 U4.14 U4.15 U4.16 U5.0 U5.4

## Polygon pours and split planes (outlines as drawn)
GND on Top Layer "TL_12V_GND" (solid, pour order 42): 4310,3905 4210,3905 4170,3922.14 4170,3957.04 4200.35,3975 4310,3975
Vbat on Top Layer "TL_12V_VBat" (solid, pour order 40): 4780,2305 4780,2465 5000,2465 5000,2305
NetD9_A on Top Layer "Top Layer-NetD9_A" (solid, pour order 6): 3955,3545.9 3955,3374.65 3990,3339.65 4815,3339.65 4865,3389.65 4865,3510.36 4811.11,3579.65 3982,3579.65
NetC22_1 on Top Layer "Top Layer-NetC22_1" (solid, pour order 8): 4665,2464.65 4700,2499.65 4700,2699.65 4740,2739.65 4815,2739.65 4865,2789.65 4865,3239.65 4790,3314.65 4340,3314.65 4300,3274.65 4300,2904.65 4415,2789.65 4415,2514.65 4465,2464.65
12V on Top Layer "Top Layer-NetC23_2" (solid, pour order 10): 3695,2229.65 3775,2309.65 3775,3629.65 3715,3689.65 3490,3689.65 3430,3629.65 3430,2289.65 3490,2229.65
NetC20_1 on Top Layer "Top Layer-NetC20_1" (solid, pour order 12): 3980,2229.65 4265,2514.65 4265,3289.65 4240,3314.65 3990,3314.65 3940,3264.65 3940,2944.65 3800,2804.65 3800,2254.65 3825,2229.65
Vbat on Battery Voltage "Battery Voltage-Vbat" (solid, pour order 26): 3935,2150 5265,2150 5375,2260 5375,4500 4065,4500 3550,4500 2200,4500 2200,1620 3610,1620 3685,1695 3685,1900
3V3 on Battery Voltage "3V3_VBatL" (solid, pour order 36): 5425,4500 5425,2415 7155,2415 7155,4500
no net on Battery Voltage "Battery Voltage-No Net" (solid, pour order 32): 5690,2975
no net on Battery Voltage "Battery Voltage-No Net 1" (solid, pour order 34): 6660,2020
no net on Battery Voltage "Battery Voltage-No Net 2" (solid, pour order 38): 6620,3800
GND on Ground "Ground" (solid, pour order 30): 2200,1620 4500,1620 7155,1620 7155,4500 2200,4500

## Keep-outs
Keep-Out Layer:
  lines w20: 2175,1600 2175,4525 7195,4525 7195,1600 2175,1600

## Other copper
Top Layer:
  rectangle net GND: 4175,3929.65 4175,3949.65
Ground:
  pour cut-out: 6617.5,1910 6467.5,2060 6267.5,2060 6102.5,1895 6102.5,1625 6617.5,1625
  pour cut-out: 3302.5,4217.5 3452.5,4067.5 3652.5,4067.5 3817.5,4232.5 3817.5,4502.5 3302.5,4502.5
  pour cut-out: 4200,1912.5 4050,2062.5 3850,2062.5 3685,1897.5 3685,1627.5 4200,1627.5
Battery Voltage:
  pour cut-out: 3305.3,4215.3 3455.3,4065.3 3655.3,4065.3 3820.3,4230.3 3820.3,4500.3 3305.3,4500.3

## Silkscreen, mask and mechanical layers (free items; w line width, h text height)
Top Overlay:
  text "MOTORS" at 5710,4325 h32
  text "TX" at 6400,3125 h32
  text "RX" at 6500,3125 h32
  text "SERVOS" at 6830,3000 h32
  text "PNEUMATICS" at 6370,2970 h32
  text "SCL" at 6075,2395 h32
  text "SDA" at 6075,2345 h32
  text "I2C_BUS" at 6250,2210 h32
  text "VBat" at 2850,2105 h60
  text "12V" at 3345,2095 h60
  text "5V" at 2285,1940 h60
  text "CU Boulder RoboSub" at 4710,1735 h32
  text "MiniSub Power Board Rev 2" at 4710,1665 h32

## Dimensions
2175,1600 to 2175,4525 on Mechanical 13
2175,1600 to 7195,1600 on Mechanical 13

## Text inside footprints (layer, text, board x,y; h text height)
D2: Top Overlay "K" at 4562.2,1731.42 h31.5 r270; Top Overlay "A" at 4562.2,1778.66 h31.5 r270
D3: Top Overlay "A" at 4427.2,1779.45 h31.5 r270; Top Overlay "K" at 4427.2,1732.2 h31.5 r270
D4: Top Overlay "K" at 4287.2,1731.42 h31.5 r270; Top Overlay "A" at 4287.2,1778.66 h31.5 r270
D6: Top Overlay "A" at 4993.66,4237.44 h31.5 r180; Top Overlay "K" at 4946.42,4237.44 h31.5 r180
D7: Top Overlay "K" at 4987.2,3846.06 h31.5 r270; Top Overlay "A" at 4987.2,3893.31 h31.5 r270
D9: Top Overlay "K" at 4750.39,3282.48 h60 r270; Top Overlay "A" at 4750.39,3392.72 h60 r270
D10: Top Overlay "A" at 3811.54,2354.25 h60 r180; Top Overlay "K" at 3701.3,2354.25 h60 r180
J1: Top Overlay "1" at 2714.37,1855.63 h19.68; Top Overlay "2" at 2596.26,1855.63 h19.68; Top Overlay "4" at 2596.26,1973.74 h19.68; Top Overlay "3" at 2714.37,1973.74 h19.68
J2: Top Overlay "1" at 3573.43,1855.71 h19.68; Top Overlay "2" at 3455.32,1855.71 h19.68; Top Overlay "4" at 3455.32,1973.82 h19.68; Top Overlay "3" at 3573.43,1973.82 h19.68
J3: Top Overlay "1" at 3148.43,1855.71 h19.68; Top Overlay "2" at 3030.32,1855.71 h19.68; Top Overlay "4" at 3030.32,1973.82 h19.68; Top Overlay "3" at 3148.43,1973.82 h19.68
U2: Top Overlay "VIN" at 2431,4475 h30 r270